# Altium PCB PCB1.PcbDoc
Units mm, origin at the board's own origin, x right, y up, seen from the top; angles counter-clockwise.
Board outline 90 x 63 mm, 2 copper layers (Top Layer, Bottom Layer); 58 components, 71 nets, 341 pads, 142 vias.
Unrouted connection lines stored in the file: 1.
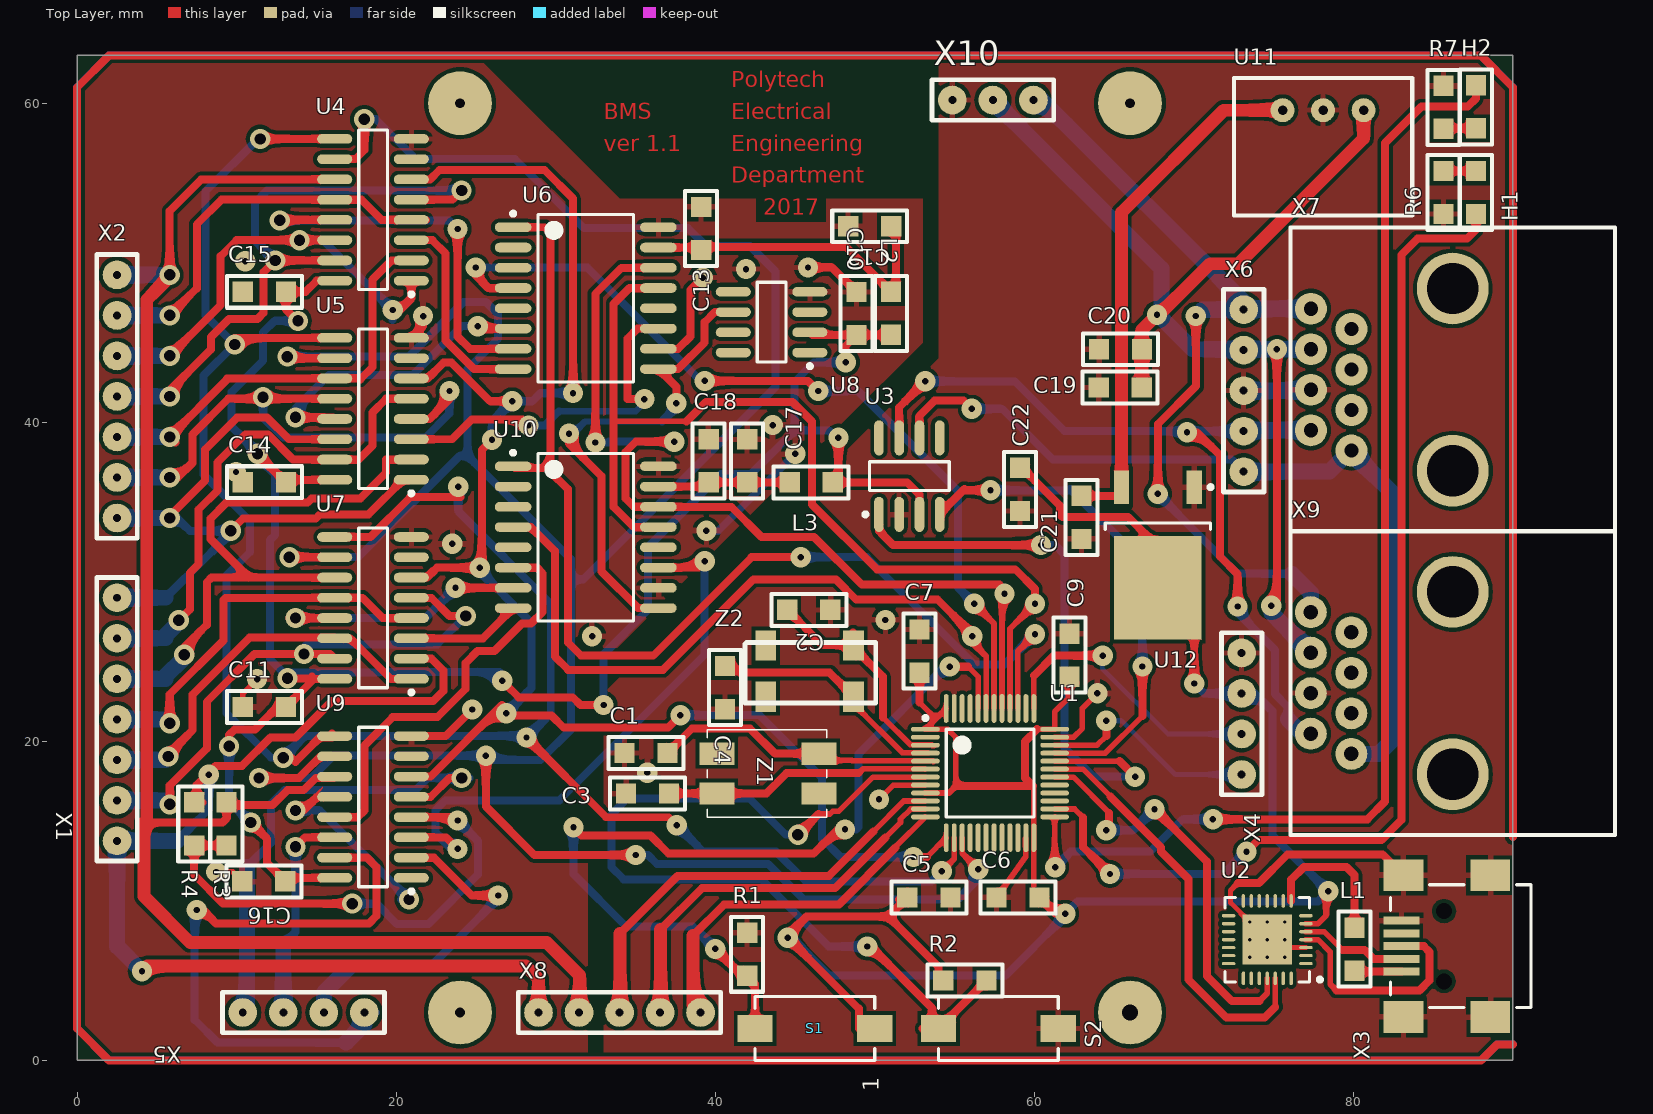
[diagram p0: Top Layer view]
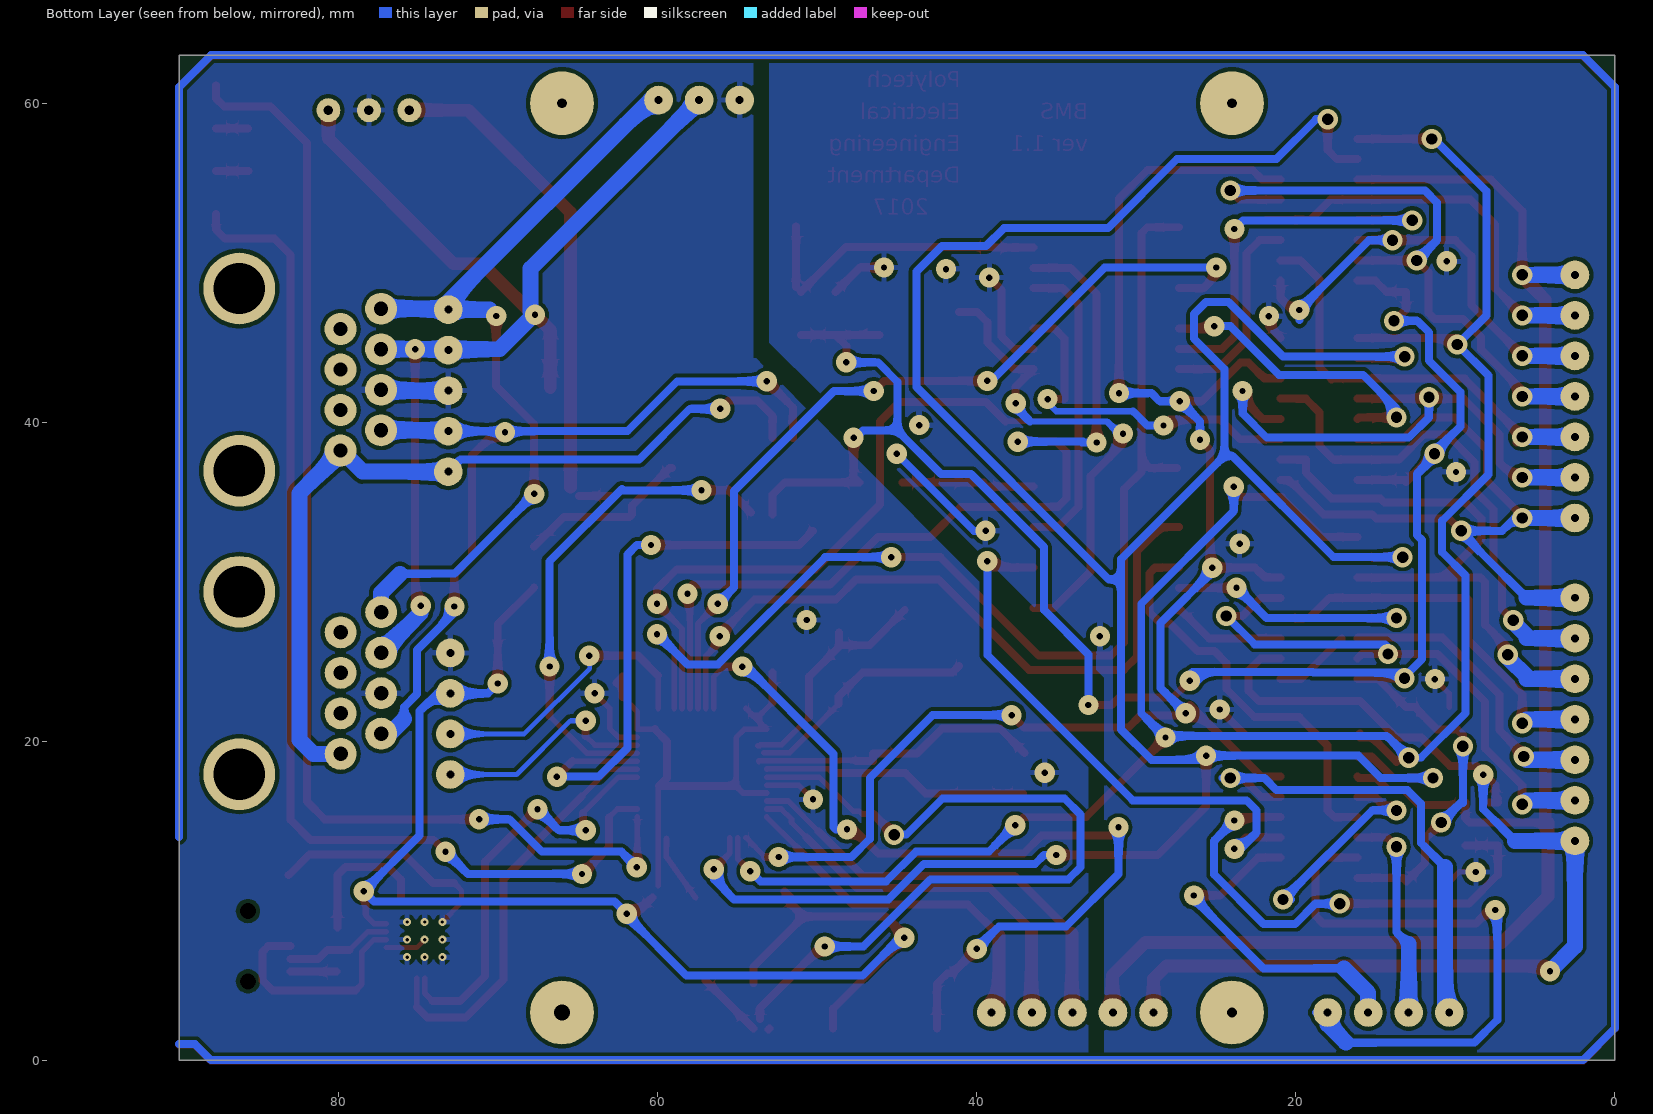
[diagram p1: Bottom Layer view, seen from below]
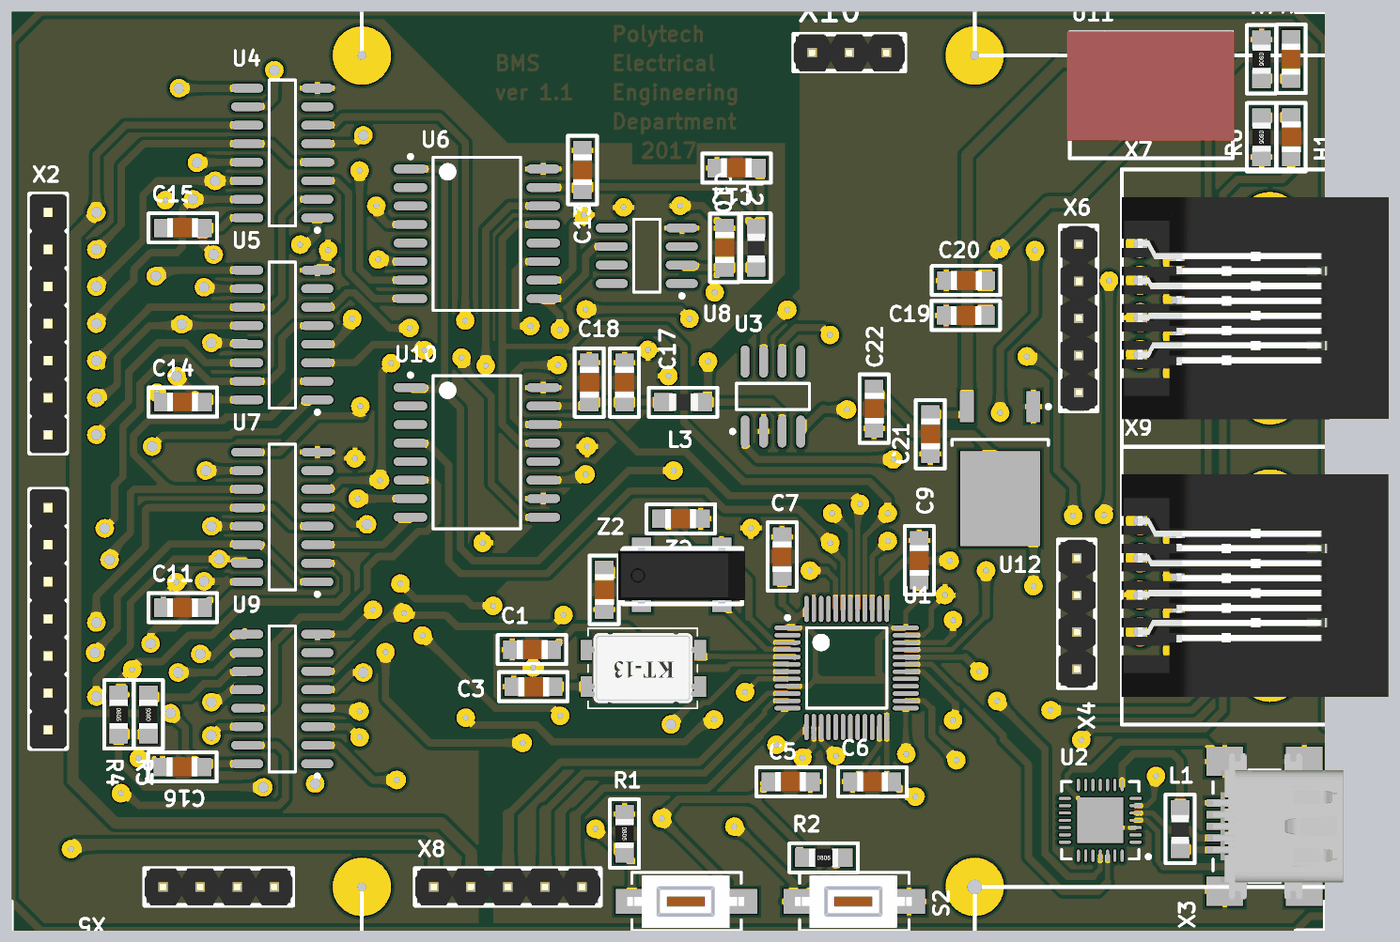
[diagram p2: 3D render of the assembled board from above, using the file's embedded part models]

## Layer stack, top to bottom
Top Solder: solder mask 0.0102, Solder Resist, Dk 3.5
Top Layer: signal copper 0.0356
Dielectric 1: dielectric 0.32, FR-4, Dk 4.8
Bottom Layer: signal copper 0.0356
Bottom Solder: solder mask 0.0102, Solder Resist, Dk 3.5

## Board outline
0,0 0,63 90,63 90,0

## Design rules (kind name [scope] priority, off if disabled: settings)
Clearance Poly_Clearance [All vs InPoly] p1: gap=0.25
Clearance Clearance_1 [All] p2: gap=0.15
PolygonConnect [All] p1: connectstyle=Relief reliefconductorwidth=0.35 reliefentries=4 polygonreliefangle="90 Angle" airgapwidth=0.254
RoutingVias [All] p1: holewidth=0.711 width=1.27 viastyle="Through Hole" minholewidth=0.711 minwidth=1.27 maxholewidth=0.711 maxwidth=1.27
ShortCircuit [InNet('-12V') vs InNet('GNDA')] p1: allowed=TRUE
SolderMaskExpansion [All] p1: expansion=0.102
Width [All] p1: maxlimit=2 minlimit=0.254 preferedwidth=0.35
29 further rules are at their usual default settings.

## Components (designator, comment, footprint, x,y, rotation, side; value= is the part's Value field where it differs from the comment)
C1 "22pF" C0805 34.308,19.27 r0 top
C2 "10pF" C0805 47.214,28.241 r180 top
C3 "22pF" C0805 34.402,16.73 r0 top
C4 "10pF" C0805 40.61,22.018 r90 top
C5 "100nF" C0805 54.74,10.207 r180 top
C6 "100nF" C0805 57.628,10.207 r0 top
C7 "100nF" C0805 52.802,27.004 r270 top
C9 "100nF" C0805 62.2,26.75 r270 top
C10 "100nF" C0805 48.856,45.471 r90 top
C11 "100nF" C0805 13.084,22.145 r180 top
C12 "100nF" C0805 51.034,52.289 r180 top
C13 "1nF" C0805 39.116,50.8 r90 top
C14 "100nF" C0805 13.084,36.242 r180 top
C15 "Condensator" C0805 13.084,48.18 r180 top
C16 "100nF" C0805 13.051,11.223 r180 top
C17 "100nF" C0805 41.998,36.233 r90 top
C18 "1nF" C0805 39.585,36.233 r90 top
C19 "100nF" C0805 64.033,42.185 r0 top
C20 "100nF" C0805 64.059,44.577 r0 top
C21 "100nF" C0805 62.962,32.686 r90 top
C22 "100nF" C0805 59.106,34.442 r90 top
H1 "LED_SMD" C0805 87.686,53.052 r90 top
H2 "LED_SMD" C0805 87.686,61.127 r270 top
L1 "Inductance" L0805 80.078,5.62 r90 top
L2 "Inductance" L0805 51.024,45.48 r90 top
L3 "Inductance" L0805 47.365,36.233 r180 top
R1 "Resistor" R0805 42,8 r270 top
R2 "Resistor" R0805 54.3,5 r0 top
R3 "Resistor" R0805 9.368,13.476 r90 top
R4 "Resistor" R0805 7.336,16.176 r270 top
R6 "Resistor" R0805 85.654,55.752 r270 top
R7 "Resistor" R0805 85.654,61.094 r270 top
S1 "Tact_switch" Tact_switch_smd 50,2 r180 top
S2 "Tact_switch" Tact_switch_smd 61.5,2 r180 top
U1 "STM32F103C8T6" LQFP48_N 57.226,18.009 r0 top
U2 "CP2102-GM" SLAB-QFN-28-3125x3125TP_N 74.605,7.566 r180 top
U3 "MCP2551-I/SN" SOIC-SN8_N 52.167,36.623 r90 top
U4 "M74HC4052M1R" SO16_N 18.546,53.318 r180 top
U5 "M74HC4052M1R" SO16_N 18.546,40.841 r180 top
U6 "AD7705BRZ-REEL7" RW-16_N 31.881,47.781 r0 top
U7 "M74HC4052M1R" SO16_N 18.546,28.363 r180 top
U8 "REF194GSZ" ADI-R-8_N 43.529,46.275 r180 top
U9 "M74HC4052M1R" SO16_N 18.546,15.886 r180 top
U10 "AD7705BRZ-REEL7" RW-16_N 31.881,32.795 r0 top
U11 "DC/DC 5v" "DC/DC R-78E" 80.645,59.563 r180 top
U12 "LD1117ADT12TR" TO-252_N 67.745,31.679 r270 top
X1 "PINS 7x2.54" "PINS 7X2.54" 2.5,29 r270 top
X2 "PINS 7x2.54" "PINS 7X2.54" 2.5,49.24 r270 top
X3 "miniUSB" miniUSB 88.786,7.156 r90 top
X4 "Pins 4x2.54" "Pins 4x2.54" 73,17.92 r90 top
X5 "Pins 4x2.54" "Pins 4x2.54" 18,3 r180 top
X6 "Pins 5x2.54" "Pins 5x2.54" 73.127,36.903 r90 top
X7 "RJ45" RJ45 79.883,38.227 r90 top
X8 "Pins 5x2.54" "Pins 5x2.54" 28.92,3 r0 top
X9 "RJ45" RJ45 79.88,19.21 r90 top
X10 "Pins 3x2.54" "Pins 3x2.54" 54.864,60.198 r0 top
Z1 "12 MHz" "kx 13 12MHz" 46.5,16.73 r180 top
Z2 "32.768kHz" "Geyer KX - 327S 32.768kHz" 48.666,26.001 r180 top

## Footprints (in the part's own frame and the unit in brackets; to place one, negate y for a bottom-side part, rotate by r counter-clockwise, add the part's x,y. Pads: shape width x height; smd on the part's side, far side on the other; paste and mask are expansions set on the pad)
ADI-R-8_N [mm] "SOIC, 8-Leads, Body 4.9x3.9mm, Pitch 1.27mm, IPC Medium Density"
  oval 2.2x0.6 smd: 1(-2.4,1.905) 2(-2.4,0.635) 3(-2.4,-0.635) 4(-2.4,-1.905) 5(2.4,-1.905) 6(2.4,-0.635) 7(2.4,0.635) 8(2.4,1.905)
  silkscreen extent -2.53,-2.5 0.9,2.88, body extent -2,-2.5 2,2.5, height 1.75
C0805 [mm]
  rect 1.27x1.27 smd: 1(0,0) 2(2.7,0)
  silkscreen extent -1,-1 3.7,1, body extent 0.32,-0.66 2.42,0.64, height 0.51
"DC/DC R-78E" [mm]
  round 1.5 hole 0.6: 1(0,0) 2(2.54,0) 3(5.08,0)
  silkscreen extent -3.05,-2.03 8.13,6.6, body extent -3.16,-2.13 8.34,5.42, height 3.18
"Geyer KX - 327S 32.768kHz" [mm]
  rect 1.3x1.9 smd: 1(0,0) 2(0,3.2) 3(5.5,3.2) 4(5.5,0)
  silkscreen extent -1.4,-0.2 6.8,3.6, body extent -1.6,-0.25 7.1,3.55, height 2.51
"kx 13 12MHz" [mm]
  rect 2.2x1.4 smd: 1(0,-2.5) 2(6.4,-2.5) 3(6.4,0) 4(0,0)
  silkscreen extent -0.5,-4 7,1.5, body extent -0.27,-3.77 6.73,1.23
L0805 [mm]
  rect 1.27x1.27 smd: 1(0,0) 2(2.7,0)
  silkscreen extent -1,-1 3.7,1, body extent 0.32,-0.6 2.32,0.6
LQFP48_N [mm] "Thin QFP, 48-Leads, Body 7x7mm, Pitch 0.5mm, IPC Medium Density"
  oval 1.8x0.3 smd: 1(-4.05,2.75) 2(-4.05,2.25) 3(-4.05,1.75) 4(-4.05,1.25) 5(-4.05,0.75) 6(-4.05,0.25) 7(-4.05,-0.25) 8(-4.05,-0.75) 9(-4.05,-1.25) 10(-4.05,-1.75) 11(-4.05,-2.25) 12(-4.05,-2.75) 25(4.05,-2.75) 26(4.05,-2.25) 27(4.05,-1.75) 28(4.05,-1.25) 29(4.05,-0.75) 30(4.05,-0.25) 31(4.05,0.25) 32(4.05,0.75) 33(4.05,1.25) 34(4.05,1.75) 35(4.05,2.25) 36(4.05,2.75)
  oval 0.3x1.8 smd: 13(-2.75,-4.05) 14(-2.25,-4.05) 15(-1.75,-4.05) 16(-1.25,-4.05) 17(-0.75,-4.05) 18(-0.25,-4.05) 19(0.25,-4.05) 20(0.75,-4.05) 21(1.25,-4.05) 22(1.75,-4.05) 23(2.25,-4.05) 24(2.75,-4.05) 37(2.75,4.05) 38(2.25,4.05) 39(1.75,4.05) 40(1.25,4.05) 41(0.75,4.05) 42(0.25,4.05) 43(-0.25,4.05) 44(-0.75,4.05) 45(-1.25,4.05) 46(-1.75,4.05) 47(-2.25,4.05) 48(-2.75,4.05)
  silkscreen extent -4.17,-2.75 2.75,3.57, body extent -3.5,-3.5 3.5,3.5, height 1.6
miniUSB [mm]
  rect 0.5x2.25 smd: 1(-1.6,5.775) 2(-0.8,5.775) 3(0,5.775) 4(0.8,5.775) 5(1.6,5.775)
  rect 2x2.5 smd: 6(-4.45,5.65) 7(4.45,5.65) 8(-4.45,0.2) 9(4.45,0.2)
  rect 0x0 hole 1 unplated: ""(-2.2,3.1) ""(2.2,3.1)
  silkscreen extent -3.85,-2.35 3.85,6.45, body extent -5,-2.45 5,6.45, height 3.95
"Pins 3x2.54" [mm]
  round 1.8 hole 0.5: 1(0,0) 2(2.54,0) 3(5.08,0)
  silkscreen extent -1.27,-1.27 6.35,1.27, body extent -1.27,-1.27 6.35,1.27, height 8.81
"Pins 4x2.54" [mm]
  round 1.8 hole 0.5: 1(0,0) 2(2.54,0) 3(5.08,0) 4(7.62,0)
  silkscreen extent -1.27,-1.27 8.89,1.27, body extent -1.27,-1.27 8.89,1.27, height 8.81
"Pins 5x2.54" [mm]
  round 1.8 hole 0.5: 1(0,0) 2(2.54,0) 3(5.08,0) 4(7.62,0) 5(10.16,0)
  silkscreen extent -1.27,-1.27 11.43,1.27, body extent -1.27,-1.27 11.43,1.27, height 8.81
"PINS 7X2.54" [mm]
  round 1.8 hole 0.5: 1(0,0) 2(2.54,0) 3(5.08,0) 4(7.62,0) 5(10.16,0) 6(12.7,0) 7(15.24,0)
  silkscreen extent -1.27,-1.27 16.51,1.27, body extent -1.27,-1.27 16.51,1.27, height 8.54
R0805 [mm]
  rect 1.27x1.27 smd: 1(0,0) 2(2.7,0)
  silkscreen extent -1,-1 3.7,1, body extent 0.35,-0.62 2.35,0.63, height 0.61
RJ45 [mm]
  round 2 hole 0.9: 1(0,0) 2(1.27,2.54) 3(2.54,0) 4(3.81,2.54) 5(5.08,0) 6(6.35,2.54) 7(7.62,0) 8(8.89,2.54)
  round 4.5 hole 3.21: 9(-1.27,-6.35) 10(10.16,-6.35)
  silkscreen extent -5.08,-16.51 13.97,3.81, body extent -3.18,-14.48 12.07,3.81, height 12.7
RW-16_N [mm] "SOIC, 16-Leads, Body 10.3x7.5mm, Pitch 1.27mm, IPC Medium Density"
  oval 2.3x0.6 smd: 1(-4.55,4.445) 2(-4.55,3.175) 3(-4.55,1.905) 4(-4.55,0.635) 5(-4.55,-0.635) 6(-4.55,-1.905) 7(-4.55,-3.175) 8(-4.55,-4.445) 9(4.55,-4.445) 10(4.55,-3.175) 11(4.55,-1.905) 12(4.55,-0.635) 13(4.55,0.635) 14(4.55,1.905) 15(4.55,3.175) 16(4.55,4.445)
  silkscreen extent -4.67,-5.25 3,5.42, body extent -3.8,-5.25 3.8,5.25, height 2.65
SLAB-QFN-28-3125x3125TP_N [mm] "QFN, 28-Leads, Body 5x5mm, Pitch 0.5mm, Thermal Pad 3.13x3.13mm, IPC Medium Density"
  oval 0.85x0.2 smd: 1(-2.425,1.5) 2(-2.425,1) 3(-2.425,0.5) 4(-2.425,0) 5(-2.425,-0.5) 6(-2.425,-1) 7(-2.425,-1.5) 15(2.425,-1.5) 16(2.425,-1) 17(2.425,-0.5) 18(2.425,0) 19(2.425,0.5) 20(2.425,1) 21(2.425,1.5)
  oval 0.2x0.85 smd: 8(-1.5,-2.425) 9(-1,-2.425) 10(-0.5,-2.425) 11(0,-2.425) 12(0.5,-2.425) 13(1,-2.425) 14(1.5,-2.425) 22(1.5,2.425) 23(1,2.425) 24(0.5,2.425) 25(0,2.425) 26(-0.5,2.425) 27(-1,2.425) 28(-1.5,2.425)
  rect 3.13x3.13 smd: 29(0,0)
  silkscreen extent -3.42,-2.65 2.65,2.65, body extent -2.5,-2.5 2.5,2.5, height 1
SO16_N [mm] "SOIC, 16-Leads, Body 9.9x3.9mm, Pitch 1.27mm, IPC Medium Density"
  oval 2.2x0.6 smd: 1(-2.4,4.445) 2(-2.4,3.175) 3(-2.4,1.905) 4(-2.4,0.635) 5(-2.4,-0.635) 6(-2.4,-1.905) 7(-2.4,-3.175) 8(-2.4,-4.445) 9(2.4,-4.445) 10(2.4,-3.175) 11(2.4,-1.905) 12(2.4,-0.635) 13(2.4,0.635) 14(2.4,1.905) 15(2.4,3.175) 16(2.4,4.445)
  silkscreen extent -2.53,-5 0.9,5.42, body extent -1.95,-4.95 1.95,4.95, height 1.75
SOIC-SN8_N [mm] "SOIC, 8-Leads, Body 4.9x3.8mm, Pitch 1.27mm, IPC Medium Density"
  oval 2.2x0.6 smd: 1(-2.4,1.905) 2(-2.4,0.635) 3(-2.4,-0.635) 4(-2.4,-1.905) 5(2.4,-1.905) 6(2.4,-0.635) 7(2.4,0.635) 8(2.4,1.905)
  silkscreen extent -2.52,-2.5 0.9,2.88, body extent -2,-2.5 2,2.5, height 1.75
Tact_switch_smd [mm]
  rect 2.2x1.7 smd: 1(0,0) 2(7.5,0)
  silkscreen extent 0,-2 7.5,2, body extent -0.19,-1.8 7.81,1.8, height 2.51
TO-252_N [mm] "D-PAK, 4-Leads, Body 6.1x6.5mm, Pitch 2.28mm, Lead Span 9.7mm, IPC Medium Density"
  rect 2.1x0.95 smd: 1(-4.25,2.28) 3(-4.25,-2.28)
  rect 6.5x5.5 smd: 4(2.05,0)
  silkscreen extent -4.37,-3.3 -1.6,3.43, body extent -2,-3.3 4.2,3.3, height 2.4

## Part data
C1 C2 C3 C4 C5 C6 C7 C9 C10 C11 C12 C13 C14 C16 C17 C18 C19 C20 C21 C22: library part Condensator
U1: "STM32 ARM-based 32-bit MCU with 64 Kbytes Flash, 48-pin LQFP, Industrial Temperature"
U2: "Single-Chip USB to UART Bridge, 1024 Bytes EEPROM, -40 to 85 degC, 28-pin QFN, Tube"
U3: "High-Speed CAN Transceiver, 8-Pin SOIC, Industrial Temperature"
U4 U5 U7 U9: "Analog Multiplexer/Demultiplexer Dual 4-Channel"
U6 U10: "Dual 16-Bit Sigma-Delta Analog-to-Digital Converter with Serial, SPI Interface, 1 mW, 3 V / 5 V, 500SPS, -40 to +85 degC, RW-16, Pb-Free, Reel"
U8: "Precision Micropower, Low Dropout Voltage Reference, 4.5 V Output, 4.6 to 15 V Supply, Industrial, 8-pin SOIC (R-8), Tube"
U11: library part "DC/DC R-78E"
U12: "1A, Low Drop Positive Voltage Regulator, 1.2V, 3-Pin DPAK, Tape and Reel"
Z1: library part "KX 13 Geyer"
Z2: library part "Crystal Oscillator"

## Free pads (board coordinates)
  round 4 hole 0.6: 1(24,3) 2(24,60) 3(66,60)
  round 4 hole 1: 4(66,3)

## Via types
v1: diameter 1.27, hole 0.4, Top Layer to Bottom Layer, 93 vias
v2: diameter 1.27, hole 0.711, Top Layer to Bottom Layer, 40 vias
v3: diameter 0.5, hole 0.2, Top Layer to Bottom Layer, 9 vias

## Nets (pads, with @x,y where several pads share a name; then routed paths per layer and width w, separated by ;. In a path a pad name is that pad's centre, name@x,y a point inside that pad or via, vN(x,y) a via of type N, cw(c..) or ccw(c..) an arc to the next point about the centre after c; other vN are vias at no path point)
+3.3V: C5.2 C6.2 C7.2 C9.2 C22.2 R2.1 S1.1 U1.1 U1.9 U1.24 U1.36 U1.48 U2.6 U12.4 X4.3 | length 132.8
  Top Layer w0.35: 52.802,22.433 53.826,21.409 ; U1.9 54.655,16.759 55.088,17.192 55.088,20.24 54.569,20.759 U1.1 53.826,21.409 ; U1.48 53.826,21.409 ; 59.976,10.941 U1.24 59.976,17.258 ; 60.179,20.759 U1.36 61.276,21.856 62.2,22.78 ; U2.6 77.784,8.566 78.3,9.082 78.3,10.479 v1(78.427,10.606)
  Top Layer w0.5: v1@44.5,7.797 45.72,9.017 50.85,9.017 ; v1(44.547,7.692) 49,3.239 S1.1@49,2 ; C5.2@51.532,10.08 C5.2@52.04,10.588 ; C5.2 50.85,9.017 ; 52.802,22.433 C7.2 ; R2.1@54,4.834 54,5.867 50.85,9.017 ; 55.088,17.192 59.91,17.192 59.411,17.692 59.411,19.991 60.179,20.759 ; C22.2 59.251,37.142 61.62,34.773 61.62,34.214 61.773,34.061 65.888,34.061 U12.4@67.745,32.204 ; C6.2 v1@61.344,9.191 ; 62.2,22.78 C9.2 C9.2@62.581,23.669 ; U12.4 70.028,27.346 v1(70.028,23.622)
  Bottom Layer w0.5: v1@44.776,7.692 47.159,5.309 58.191,5.309 v1@61.883,9.001 ; v1(61.946,9.191) 62.712,9.957 77.778,9.957 v1(78.427,10.606) 74.93,14.103 74.93,21.895 73.825,23 X4.3 70.65,23 v1(70.028,23.622)
+5V: C10.1 C11.1 C14.1 C15.1 C16.1 L2.1 L3.1 U3.3 U4.16 U5.16 U7.16 U8.2 U9.16 | length 132.2
  Top Layer w0.5: v2(9.525,19.685) 9.525,20.397 9.876,20.748 11.146,20.748 12.543,22.145 C11.1 14.857,23.918 U7.16 ; v2(10.892,14.906) 11.908,13.89 11.908,12.366 C16.1 13.269,11.441 U9.16 ; v2@11.146,38.274 11.146,38.18 v2(11.306,38.02) C14.1 ; C14.1@13.078,36.396 U5.16 ; v2(13.183,23.952) 14.628,23.952 14.726,24.05 ; v2(13.843,46.355) 13.799,46.355 13.084,47.07 C15.1 14.321,48.18 15.014,48.873 U4.16 ; v1@26.919,23.517 27.678,22.758 31.064,22.758 31.549,22.274 v1(33,22.274) ; U8.2@46.098,45.471 47.84,45.471 C10.1 ; v1(47.722,39.036) 47.722,36.59 L3.1 52.031,36.233 52.802,35.462 U3.3 ; v1(48.179,43.76) 48.179,44.794 C10.1 ; L2.1 48.959,45.48 48.95,45.471 C10.1
  Bottom Layer w0.5: v2(9.525,19.685) 9.525,16.129 9.597,16.201 v2(10.892,14.906) ; v2(11.306,38.02) 11.306,37.86 12.416,36.75 12.416,32.94 12.09,32.614 12.09,25.146 13.182,24.054 13.432,24.304 18.893,24.304 18.949,24.36 26.467,24.36 26.64,24.187 v1(26.64,23.796) ; v2@11.306,38.114 9.677,39.743 9.677,41.885 11.654,43.862 11.654,45.64 12.369,46.355 v2(13.843,46.355) ; v2(13.183,23.952) v2@13.183,24.046 ; v1(33,22.274) 33,25.437 32.99,25.447 35.784,28.241 35.784,32.178 40.356,36.75 42.236,36.75 44.979,39.493 ; v1(47.722,39.036) 47.595,39.036 47.138,39.493 44.979,39.493 ; v1(48.179,43.76) 46.198,43.76 44.979,42.541 44.979,39.493 ; v2@13.183,24.046 13.183,24.054 13.186,24.05 v2@13.183,24.046
+12V: C19.2 C20.2 U11.1 X6.4 X7.6 X9.6 X10.2 | length 72.9
  Top Layer w0.5: v1(67.691,46.736) v1@67.818,46.736 ; v1(74.854,28.499) 75.209,28.854 v1(75.209,44.577)
  Top Layer w0.8: C19.2 66.733,45.778 v1(67.691,46.736) ; v1@67.818,46.736 71.025,49.943 72.803,49.943 80.645,57.785 U11.1
  Bottom Layer w0.5: v1(67.691,46.736) 67.767,46.736 v1@67.961,46.93 ; v1@74.854,28.046 v1(74.854,28.499)
  Bottom Layer w1: X10.2 67.961,49.641 v1@67.961,46.93 ; v1@67.767,46.736 69.926,44.577 v1(75.209,44.577) X7.6 ; v1@74.854,28.046 X9.6
+24V: X6.5 X7.8 X9.8 X10.3 | length 51.7
  Top Layer w0.5: v1(67.742,35.509) 67.742,39.878 70.129,42.266 v1(70.129,46.66) ; X7.8@77.26,47.099 X7.8@77.463,47.099
  Bottom Layer w0.5: X10.3 X10.3@60.477,60.198 ; v1(67.742,35.509) 72.746,30.505 76.149,30.505 ; v1(70.129,46.66) v1@70.533,47.063
  Bottom Layer w1: X10.3@60.477,60.198 73.558,47.117 X7.8 ; v1@70.533,47.063 X6.5 ; 76.149,30.505 77.34,29.314 X9.8
+_CELL_1: U7.5 U7.15 X1.6 | length 35.3
  Top Layer w0.5: v2(5.802,16.046) 5.802,17.232 8.128,19.558 8.128,22.479 11.125,25.476 v2(14.224,25.476) 15.858,25.476 U7.15 ; U7.5 22.2,28.998 23.338,27.86 v2(24.354,27.86)
  Bottom Layer w0.5: v2@5.548,16.3 v2(5.802,16.046) ; v2@14.008,25.692 14.398,26.082 22.576,26.082 v2(24.354,27.86)
  Bottom Layer w1: X1.6 v2@5.548,16.3
+_CELL_2: U7.1 U7.14 X1.5 | length 23.1
  Top Layer w0.5: v2(5.715,19.05) 5.715,19.177 7.239,20.701 7.239,22.937 10.813,26.511 16.093,26.511 U7.14 ; U7.14@17.12,26.458 19.66,23.918 U7.1
  Bottom Layer w0.5: v2@5.548,18.84 5.715,19.007 v2(5.715,19.05)
  Bottom Layer w1: X1.5 v2@5.548,18.84
+_CELL_3: U7.4 U7.12 X1.4 | length 24.9
  Top Layer w0.5: v2(5.802,21.126) 5.802,22.947 9.169,26.314 9.169,28.854 9.313,28.998 U7.12 17.882,28.998 19.152,27.728 U7.4
  Bottom Layer w0.5: v2@5.548,21.38 v2(5.802,21.126)
  Bottom Layer w1: X1.4 v2@5.548,21.38
+_CELL_4: U5.2 U7.11 X1.3 | length 37.7
  Top Layer w0.5: v2(6.706,25.425) 6.706,25.883 8.128,27.305 8.128,29.972 8.424,30.268 10.77,30.268 ; U7.11 10.77,30.268 ; U5.2 19.374,37.666 19.374,36.85 17.75,35.226 14.702,35.226 14.448,34.972 9.368,34.972 8.352,33.956 8.352,32.686 10.77,30.268
  Bottom Layer w0.5: 5.461,24.007 5.548,23.92 ; v2@6.706,25.252 v2(6.706,25.425)
  Bottom Layer w1: X1.3 5.548,23.92 ; 5.461,24.007 v2@6.706,25.252
+_CELL_5: U5.5 U5.15 X1.2 | length 31.8
  Top Layer w0.5: v2(6.375,27.584) 7.061,28.27 7.061,30.556 7.62,31.115 7.62,34.544 8.788,35.712 8.788,37.49 10.541,39.243 11.955,39.243 13.532,37.666 U5.15 17.65,37.666 18.512,38.528 18.512,40.613 19.374,41.476 U5.5
  Bottom Layer w0.5: 5.465,26.543 5.548,26.46 ; v2@6.375,27.453 v2(6.375,27.584)
  Bottom Layer w1: X1.2 5.548,26.46 ; 5.465,26.543 v2@6.375,27.453
+_CELL_6: U5.1 U5.14 X1.1 X2.7 | length 43.8
  Top Layer w0.5: v2(5.802,34) 5.802,34.123 8.026,36.347 8.026,38.299 10.033,40.306 11.908,40.306 13.278,38.936 U5.14 ; v2(9.622,33.194) 10.384,33.956 14.956,33.956 15.21,34.21 18.252,34.21 20.438,36.396 U5.1
  Bottom Layer w0.5: 5.548,29 9.622,33.074 v2(9.622,33.194) 7.082,33.194 6.276,34 v2(5.802,34)
  Bottom Layer w1: X1.1 5.548,29 ; X2.7 v2(5.802,34)
+_CELL_7: U5.4 U5.12 X2.6 | length 35.7
  Top Layer w0.5: v2(5.802,36.54) 6.31,36.54 7.226,37.456 7.226,39.23 9.472,41.476 U5.12 ; U5.4 22.095,40.206 23.338,41.449 v1(23.338,41.957)
  Bottom Layer w0.5: v2(11.654,41.576) 11.654,40.306 12.924,39.036 21.814,39.036 23.338,40.56 v1(23.338,41.957)
  Bottom Layer w1: X2.6 v2(5.802,36.54)
+_CELL_8: U4.2 U5.11 X2.5 | length 26.9
  Top Layer w0.5: v2@6.156,38.726 v2(5.802,39.08) 9.398,42.676 9.398,42.746 U5.11 17.75,42.746 17.75,42.692 18.512,43.454 18.512,48.942 19.713,50.143 U4.2
  Bottom Layer w1: X2.5 v2(5.802,39.08)
+_CELL_9: U4.5 U4.15 X2.4 | length 40.1
  Top Layer w0.5: v2(5.802,41.62) 5.802,41.997 8.382,44.577 8.382,45.339 9.525,46.482 11.303,46.482 11.684,46.863 11.684,49.411 v2(12.416,50.143) U4.15 ; U4.5 23.523,53.953 v2(24.1,54.53)
  Bottom Layer w0.5: v2(12.416,50.143) 11.146,51.413 11.146,53.768 11.908,54.53 v2(24.1,54.53)
  Bottom Layer w1: X2.4 v2(5.802,41.62)
+_CELL_10: U4.1 U4.14 X2.3 | length 29.3
  Top Layer w0.5: v2(5.802,44.16) 9,47.358 9,50.413 10,51.413 v2(13.94,51.413) U4.14 ; v1(19.782,47.037) 20.205,47.037 20.946,47.778 U4.1
  Bottom Layer w0.5: v2(13.94,51.413) 15.406,51.413 v1(19.782,47.037) 19.782,46.402
  Bottom Layer w1: X2.3 v2(5.802,44.16)
+_CELL_11: U4.4 U4.12 X2.2 | length 25.3
  Top Layer w0.5: v2(5.802,46.7) 7.5,48.398 7.5,52.408 9.045,53.953 U4.12 17.819,53.953 19.089,52.683 U4.4 U4.4@21.872,52.683
  Bottom Layer w1: X2.2 v2(5.802,46.7)
+_CELL_12: R3.2 U4.11 U9.11 X2.1 X8.2 | length 103.6
  Top Layer w0.5: 4.369,15.084 4.191,14.906 9.114,14.906 9.368,15.16 R3.2 9.542,16.002 12.242,16.002 13.178,16.938 14.194,16.938 14.956,17.7 16.055,17.7 U9.11 ; v2@5.802,49.121 v2(5.802,49.24) 5.802,53.25 7.775,55.223 U4.11
  Top Layer w0.8: 4.191,14.906 4.191,10.287 7.082,7.396 29.434,7.396 31.496,5.334 X8.2@31.496,3.036 ; 4.369,15.084 4.369,47.688 v2@5.802,49.121
  Bottom Layer w1: X2.1 v2(5.802,49.24)
-_CELL_1: R4.1 U7.2 X1.7 X8.1 | length 67.9
  Top Layer w0.5: v1(4.064,5.588) v1@4.394,5.918 ; R4.1 R4.1@7.844,16.176 ; R4.1@7.336,16.43 7.493,16.587 7.493,17.272 8.67,18.449 10.321,18.449 12.112,20.24 13.686,20.24 15.972,22.526 22.322,22.526 22.962,23.166 22.962,24.426 22.2,25.188 U7.2
  Top Layer w0.8: v1@4.394,5.918 28.118,5.918 28.92,5.116 X8.1
  Bottom Layer w0.5: X1.7 X1.7@2.51,13.76 ; 6.267,13.76 8.255,15.748 v1(8.255,17.907)
  Bottom Layer w1: v1(4.064,5.588) 2.51,7.142 2.51,13.76 6.267,13.76
ADC1_CH1+: U4.13 U6.7 | length 25.4
  Top Layer w0.5: v2@12.67,52.625 v2(12.699,52.654) 12.728,52.683 U4.13 ; v1(23.846,52.117) 23.846,45.386 24.626,44.606 U6.7
  Bottom Layer w0.5: v2(12.699,52.654) 23.309,52.654 v1(23.846,52.117)
ADC1_CH1-: U4.3 U6.8 | length 12.9
  Top Layer w0.5: U4.3 22.264,51.413 23.084,50.593 23.084,45.132 24.88,43.336 U6.8
ADC1_CH2+: U5.13 U6.6 | length 18.9
  Top Layer w0.5: v2(13.686,40.306) 16.046,40.306 U5.13 ; v1(25.116,46.021) 25.261,45.876 U6.6
  Bottom Layer w0.5: v2(13.686,40.306) 13.686,40.867 15.792,42.973 21.052,42.973 24.1,46.021 v1(25.116,46.021)
ADC1_CH2-: U5.3 U6.11 | length 23.1
  Top Layer w0.5: U5.3 23.492,38.936 24.735,40.179 27.91,40.179 v1(28.291,39.798) ; v1(35.56,41.453) 34.514,41.453 34.514,45.259 35.131,45.876 U6.11
  Bottom Layer w0.4: 30.196,40.687 35.022,40.687 v1@35.56,41.225
  Bottom Layer w0.5: v1(28.291,39.798) 29.307,39.798 30.196,40.687 ; v1@35.56,41.225 v1(35.56,41.453)
ADC2_CH1+: U7.13 U10.7 | length 17.6
  Top Layer w0.5: v2@13.31,27.728 v2(13.686,27.728) U7.13 ; v1@23.465,29.511 23.574,29.62 v1(23.719,29.62) U10.7
  Bottom Layer w0.5: v2(13.686,27.728) 21.827,27.728 ; 21.832,27.733 v1(23.719,29.62)
ADC2_CH1-: U7.3 U10.8 | length 7.2
  Top Layer w0.5: U7.3 25.439,26.458 U10.8
ADC2_CH2+: U9.13 U10.6 | length 26.1
  Top Layer w0.5: U9.13 17.587,15.251 18.004,15.668 18.004,19.732 19.782,21.51 22.576,21.51 24.358,23.292 24.358,24.917 25.096,25.654 26.162,25.654 27.89,27.382 28.448,27.382 29.18,28.114 29.18,30.527 28.817,30.89 U10.6
ADC2_CH2-: U9.3 U10.11 | length 36.3
  Top Layer w0.5: U9.3 23.12,13.981 v1(23.846,13.255) ; U10.11 38.941,30.89 v1(39.34,31.289)
  Bottom Layer w0.5: v1(23.846,13.255) 23.465,13.255 22.449,14.271 22.449,15.668 23.084,16.303 30.222,16.303 39.34,25.421 v1(39.34,31.289)
ANALOG1_+: U9.12 | length 12.7
  Top Layer w0.5: v2(13.686,15.668) 14.194,15.668 15.047,16.521 U9.12
  Bottom Layer w0.5: v2(13.686,15.668) 15.21,15.668 20.544,10.334 20.29,10.08 v2(20.798,10.08)
ANALOG1_-: U9.1
ANALOG2_+: U9.14 X5.3 | length 13.4
  Top Layer w0.5: v2(13.686,13.382) 14.285,13.981 U9.14
  Bottom Layer w0.5: 12.92,7.282 13.686,8.048 v2(13.686,13.382)
  Bottom Layer w1: X5.3 12.92,7.282
ANALOG2_-: U9.5 X5.4 | length 30.2
  Top Layer w0.5: U9.5 22.159,16.521 23.338,17.7 v2(24.1,17.7)
  Bottom Layer w0.5: 10.638,12.112 12.162,13.636 12.162,16.099 13.001,16.938 21.205,16.938 21.967,17.7 v2(24.1,17.7) v2@24.608,17.7
  Bottom Layer w1: X5.4@10.638,3.258 10.638,12.112
ANALOG3_+: U9.15 X5.1 | length 37.9
  Top Layer w0.5: v1(7.493,9.423) 7.874,9.423 8.712,8.585 18.287,8.585 18.766,9.064 18.766,12.112 18.167,12.711 U9.15
  Bottom Layer w0.5: v1(7.493,9.423) 7.366,9.296 7.366,2.54 8.788,1.118 16.866,1.118 ; X5.1@18,2.252 X5.1 X5.1@18.748,3
  Bottom Layer w1: 16.866,1.118 X5.1@18,2.252
ANALOG3_-: U9.2 X5.2 | length 21.2
  Top Layer w0.5: U9.2 22.358,12.711 24.735,10.334 v1(26.386,10.334)
  Bottom Layer w0.5: 16.988,5.762 22.018,5.762 26.386,10.13 v1(26.386,10.334)
  Bottom Layer w1: X5.2 15.46,4.234 16.988,5.762
BATT_KEY1: U1.10 X8.3 | length 27.5
  Top Layer w0.35: 49.911,14.351 51.819,16.259 U1.10
  Top Layer w0.5: 34.036,7.954 37.639,11.557 47.117,11.557 49.911,14.351
  Top Layer w0.8: X8.3@34.036,3.036 34.036,7.954
BATT_KEY2: U1.11 X8.4 | length 25
  Top Layer w0.35: 50.673,13.97 51.614,14.911 51.614,15.119 52.229,15.734 52.234,15.734 52.259,15.759 U1.11
  Top Layer w0.5: 36.576,8.208 39.163,10.795 47.498,10.795 50.673,13.97
  Top Layer w0.8: X8.4@36.576,3.036 36.576,8.208
BATT_KEY3: U1.12 X8.5 | length 22
  Top Layer w0.35: 51.308,13.335 51.308,13.391 U1.12
  Top Layer w0.5: 38.608,7.827 40.56,9.779 47.752,9.779 51.308,13.335
  Top Layer w0.8: X8.5@38.608,3.472 38.608,7.827
BOOT: R1.2 S1.2 U1.44 | length 55.8
  Top Layer w0.35: 55.85,24.685 56.476,24.059 U1.44
  Top Layer w0.5: v1(31.115,14.605) 31.623,14.097 35.941,14.097 37.084,12.954 46.154,12.954 47.678,14.478 v1(48.133,14.478) ; v1(40.005,6.985) 41.529,5.461 41.839,5.461 R1.2 42.5,4.8 S1.2 ; v1(54.707,24.685) 55.85,24.685
  Bottom Layer w0.5: v1(31.115,14.605) 31.115,11.684 34.417,8.382 38.608,8.382 v1(40.005,6.985) ; v1(48.133,14.478) 48.818,14.478 48.975,14.635 48.975,19.207 54.453,24.685 v1(54.707,24.685)
CAN_RX: U1.32 U3.1 | length 35
  Top Layer w0.35: U1.32 65.34,18.759
  Top Layer w0.5: U3.1@50.262,33.194 51.151,32.305 v1(60.422,32.305) ; 65.34,18.759 v1(66.319,17.78)
  Bottom Layer w0.5: v1(60.422,32.305) 61.311,32.305 61.9,31.716 61.9,19.583 63.703,17.78 v1(66.319,17.78)
CAN_TX: U1.33 U3.4 | length 31.3
  Top Layer w0.35: U1.33 64.446,19.259 66.777,21.59
  Top Layer w0.5: U3.4@54.148,34.337 55.625,35.814 55.701,35.738 v1(57.252,35.738) ; 66.777,21.59 v1(66.777,24.689)
  Bottom Layer w0.5: v1(57.252,35.738) 62.171,35.738 62.247,35.814 66.777,31.284 v1(66.777,24.689)
CANH: U3.7 X6.2 X7.2 X9.2 | length 53
  Top Layer w0.5: U3.7 51.532,40.94 v1(53.162,42.57) ; v1(69.571,39.37) 70.206,39.37 71.628,37.948 71.628,31.598 72.746,30.48 v1(72.746,28.448) ; X6.2@72.698,39.443 X6.2 ; X7.2@77.289,39.443 X7.2
  Bottom Layer w0.5: v1(53.162,42.57) 58.776,42.57 61.903,39.443 X6.2 X6.2@73.181,39.497 ; v1(72.746,28.448) 72.746,28.067 75.082,25.73 75.082,22.962 75.895,22.149 75.895,21.387 ; X9.2@76.802,20.48 X9.2
  Bottom Layer w1: X6.2@73.181,39.497 X7.2 ; 75.895,21.387 X9.2@76.802,20.48
CANL: U3.6 X6.1 X7.1 X9.1 | length 53.3
  Top Layer w0.5: U3.6 52.802,40.407 53.746,41.351 55.575,41.351 v1(56.083,40.843)
  Bottom Layer w0.5: v1(56.083,40.843) 57.988,40.843 61.163,37.668 72.362,37.668 X6.1
  Bottom Layer w1: X6.1 78.494,36.903 79.8,38.209 82.467,35.542 82.467,20.095 81.582,19.21 X9.1
GND: C1.1 C2.1 C3.1 C4.1 C5.1 C6.1 C7.1 C9.1 C19.1 C20.1 C21.1 C22.1 R1.1 R6.2 R7.1 S2.1 U1.8 U1.23 U1.35 U1.47 U2.3 U2.29 U3.2 U11.2 U12.1 X3.5 X3.6 X3.7 X3.8 X3.9 X4.4 X6.3 X7.4 X9.4 X10.1 | length 33.8
  Top Layer w0.3: 72.759,11.11 72.302,10.653 72.302,9.869 v3(73.505,8.666) ; v3(74.605,7.566) 75.105,7.066 U2.3
  Top Layer w0.35: v1(50.267,16.358) 51.168,17.259 U1.8 ; C6.1 59.476,12.802 U1.23@59.451,13.908 ; U1.35 62.474,20.259 63.017,20.803 63.017,22.073 v1(63.957,23.012)
  Top Layer w0.5: 72.759,11.11 74.08,11.11 75.887,12.917 81.825,12.917 X3.7
  Bottom Layer w0.3: X7.4@77.289,41.983 X7.4
  Bottom Layer w1: X6.3 X7.4@77.289,41.983
  other v1: 35.738,18.034 50.668,27.606
  other v3: 73.505,6.466 74.605,6.466 75.705,6.466 73.505,7.566 75.705,7.566 74.605,8.666 75.705,8.666
GNDA: C10.2 C11.2 C12.2 C13.2 C14.2 C15.2 C16.2 C17.2 C18.2 U4.8 U5.8 U6.10 U6.16 U7.8 U8.4 U9.8 U10.10 U10.16 | length 27.8
  Top Layer w0.35: v1(8.712,11.811) 9.763,11.811 C16.2 ; C11.2 10.384,23.008 v1(11.278,23.901)
  Top Layer w0.5: U9.8 23.1,20.331 v1(24.765,21.996) ; U5.8 21.687,46.027 v1(21.687,46.656) ; U6.10 37.671,44.606 38.451,45.386 38.451,48.307 v1(39.213,49.069) ; v1(45.817,49.704) 47.323,49.704 C10.2
  Bottom Layer w0.5: v1(39.446,33.198) 40.183,33.198 v1(45.009,38.024)
  other v1: 32.279,26.59 23.52,32.385 9.957,36.881 43.607,39.823 41.931,49.602 10.541,50.089
MULTIP_A: U1.15 U4.10 U5.10 U7.10 U9.10 | length 189.3
  Top Layer w0.35: U1.15 55.476,12.994 v1(56.485,11.985)
  Top Layer w0.5: v2(11.4,17.7) 13.896,17.7 15.257,19.061 U9.10 ; v2(13.178,44.116) 13.278,44.016 U5.10 ; v2(13.305,31.543) U7.10@16.141,31.543 ; U4.10 17.427,56.493 18,57.066 v2(18,59) ; v1(25.624,19.097) 25.624,15.905 28.655,12.874 v1(35.022,12.874)
  Bottom Layer w0.5: v2(11.4,17.7) 14.677,17.7 16.074,19.097 v1(25.624,19.097) 25.878,18.843 29.053,18.843 30.958,20.748 30.958,30.146 ; v2(13.178,44.116) 20.798,44.116 24.227,47.545 25.624,47.545 26.386,46.783 26.386,45.241 24.481,43.336 24.481,37.893 ; v2(13.305,31.543) 17.623,31.543 23.973,37.893 24.481,37.893 ; v2(18,59) 18.724,59 21.209,56.515 27.432,56.515 31.779,52.168 38.299,52.168 39.416,51.05 42.185,51.05 43.785,49.45 43.785,42.211 31.72,30.146 30.958,30.146 ; v1(35.022,12.874) 35.784,12.874 36.339,12.319 43.307,12.319 45.546,10.08 55.215,10.08 56.485,11.35 v1(56.485,11.985) ; 24.481,37.893 30.958,31.416 30.958,30.146
MULTIP_B: U1.14 U4.9 U5.9 U7.9 U9.9 | length 137.4
  Top Layer w0.35: v1(54.199,11.858) 54.976,12.635 U1.14
  Top Layer w0.5: v2@9.876,45.286 U5.9 ; v2@11.4,57.832 v2(11.469,57.763) U4.9 ; v2(12.924,18.97) 13.432,18.97 13.686,18.716 15.21,20.24 U9.9@15.972,20.24 ; U9.9@15.983,20.494 U9.9 ; U7.9 18.38,32.808 20.874,35.302 24.024,35.302 23.897,35.429 v1(23.897,35.963) ; v1(28.164,20.24) 33.164,15.24 37.084,15.24 v1(37.592,14.732)
  Bottom Layer w0.5: v2(11.469,57.763) 11.331,57.763 8.052,54.484 8.052,46.702 v2(9.876,44.878) 7.925,42.927 7.925,36.728 10.82,33.833 10.82,31.852 9.368,30.4 9.368,21.764 12.162,18.97 v2(12.924,18.97) 14.299,20.345 27.761,20.345 27.91,20.494 v1(28.164,20.24) 29.688,21.764 29.688,28.622 23.897,34.413 v1(23.897,35.963) ; v1(37.592,14.732) 39.243,13.081 43.815,13.081 45.673,11.223 53.564,11.223 v1(54.199,11.858)
MULTP_EN: U1.13 U4.6 U5.6 U7.6 U9.6 | length 105.6
  Top Layer w0.35: 53.264,12.747 U1.13
  Top Layer w0.5: U9.6 22.159,17.791 26.64,22.272 26.894,22.018 v1(26.894,21.764) 27.034,21.624 29.733,21.624 30.503,20.853 37.032,20.853 v1(37.816,21.637) ; U7.6 21.936,30.268 22.551,30.883 v1(25.243,30.883) 25.37,31.01 25.37,38.274 v1(26.005,38.909) ; U5.6 21.968,42.746 22.957,43.735 23.465,43.735 25.878,41.322 v1(27.275,41.322) ; U4.6 22.126,55.223 22.703,55.8 29.307,55.8 31.085,54.022 v1(31.085,41.83) ; v1(52.421,12.747) 53.264,12.747
  Bottom Layer w0.5: v1(25.243,30.883) 25.014,30.883 28.473,27.424 28.473,23.343 v1(26.894,21.764) ; v1@26.005,38.528 v1(26.005,38.909) 26.005,40.052 v1(27.275,41.322) 28.545,41.322 29.053,41.83 v1(31.085,41.83) ; v1(37.816,21.637) 42.769,21.637 46.706,17.7 46.706,13.89 47.849,12.747 v1(52.421,12.747)
NetC1_2: C1.2 U1.5 Z1.1 | length 18.5
  Top Layer w0.35: Z1.1@47.575,18.805 48.575,18.805 ; 48.575,18.784 53.676,18.784 U1.5@53.676,18.734
  Top Layer w0.5: C1.2 38.532,20.794 42.182,20.794 43.746,19.23 Z1.1 46.5,18.759 47.575,18.759 Z1.1@47.575,18.805
NetC2_2: C2.2 U1.3 Z2.1 | length 15
  Top Layer w0.35: 50.516,21.497 52.229,19.784 U1.3@53.565,19.784 ; U1.3@53.615,19.734 U1.3@53.712,19.734
  Top Layer w0.5: C2.2 46.732,26.023 48.644,26.023 Z2.1@48.644,26.811 ; Z2.1 48.666,25.9 50.516,24.05 50.516,21.497
NetC3_2: C3.2 U1.6 Z1.3 | length 16.7
  Top Layer w0.35: 48.988,18 49.272,18.284 53.176,18.284 U1.6
  Top Layer w0.5: C3.2 Z1.3 43.198,16.73 44.468,18 48.988,18
NetC4_2: C4.2 U1.4 Z2.2 | length 14.8
  Top Layer w0.35: Z2.2@48.666,22.344 51.726,19.284 U1.4@53.358,19.284
  Top Layer w0.5: C4.2@41.118,24.716 41.53,24.304 47.163,24.304 Z2.2 Z2.2@48.666,22.344
NetC12_1: C12.1 C13.1 L2.2 U6.15 | length 20
  Top Layer w0.35: L2.2 L2.2@51.328,48.484
  Top Layer w0.5: U6.15 C13.1@38.959,50.956 ; C13.1@38.959,50.999 48.205,50.999 L2.2 ; L2.2@51.328,48.484 C12.1@51.328,52.289
NetC17_1: C17.1 C18.1 L3.2 U10.15 | length 8
  Top Layer w0.5: U10.15 C18.1@39.322,35.97 ; C18.1 C17.1 L3.2
NetC21_2: C21.2 U11.3 U12.3 | length 31.9
  Top Layer w0.5: C21.2 64.922,35.386
  Top Layer w0.8: U12.3 65.465,53.146 71.882,59.563 U11.3
NetH1_1: H1.1 U1.26 | length 67.6
  Top Layer w0.35: U1.26 62.524,15.759 63.068,15.215
  Top Layer w0.5: 63.068,15.215 63.068,13.36 v1(64.745,11.684) ; v1(73.304,13.081) 74.041,13.818 81.763,13.818 83.007,15.062 83.007,50.495 84.023,51.511 87.122,51.511 87.686,52.075 H1.1
  Bottom Layer w0.5: v1(64.745,11.684) 71.907,11.684 v1(73.304,13.081)
NetH1_2: H1.2 R6.1 | length 2
  Top Layer w0.5: R6.1 H1.2
NetH2_1: H2.1 U1.25 | length 74.9
  Top Layer w0.35: v1@61.276,12.147 U1.25
  Top Layer w0.5: v1@61.276,12.147 v1(61.311,12.112) ; v1(71.196,15.113) 80.874,15.113 81.991,16.231 81.991,57.506 84.277,59.792 87.173,59.792 87.686,60.305 H2.1
  Bottom Layer w0.5: v1@61.717,12.112 v1(61.311,12.112) 62.28,13.081 67.259,13.081 69.291,15.113 v1(71.196,15.113)
NetH2_2: H2.2 R7.2 | length 2
  Top Layer w0.5: R7.2@85.687,58.427 H2.2
NetL1_1: L1.1 X3.1 | length 2.9
  Top Layer w0.5: L1.1@80.142,5.556 X3.1
NetL1_2: L1.2 U2.8 | length 9.2
  Top Layer w0.5: U2.8 76.105,11.332 76.903,12.13 79.57,12.13 80.078,11.622 L1.2
NetR3_1: R3.1 R4.2 U9.4 | length 30.8
  Top Layer w0.5: R3.1 R4.2 7.336,11.634 9.144,9.826 v2(17.242,9.826) ; U9.4 v1@23.628,15.251
  Bottom Layer w0.5: v2(17.242,9.826) 18.766,9.826 20.036,8.556 22.018,8.556 25.116,11.654 25.116,13.763 v1(23.846,15.033)
NetU2_4: U2.4 X3.3 | length 14.2
  Top Layer w0.35: U2.4 77.784,7.566 78.554,6.796 78.554,4.764 78.935,4.383
  Top Layer w0.5: 78.935,4.383 84.142,4.383 84.777,5.018 84.777,6.796 84.417,7.156 X3.3
NetU2_5: U2.5 X3.2 | length 6.7
  Top Layer w0.35: U2.5 78.173,8.066 79.316,6.923
  Top Layer w0.5: 79.316,6.923 80.713,6.923 81.28,6.356 X3.2
REF_4.5: U6.9 U8.6 U10.9 | length 31.2
  Top Layer w0.5: v1(30.831,39.29) 30.831,38.655 32.863,36.623 32.863,30.654 35.167,28.35 U10.9 ; v1(37.562,41.195) 37.562,42.205 U6.9 37.671,43.336 39.34,45.005 39.34,46.275 39.975,46.91 U8.6
  Bottom Layer w0.4: v1@31.085,39.29 31.847,40.052 36.673,40.052
  Bottom Layer w0.5: v1(30.831,39.29) v1@31.085,39.29 ; 36.673,40.052 37.562,40.941 v1(37.562,41.195)
RST: R2.2 S2.2 U1.7 | length 56
  Top Layer w0.35: 46.476,15.438 47.188,15.438 47.371,15.621 47.752,15.621 49.89,17.759 U1.7
  Top Layer w0.5: v2(45.182,14.144) 46.476,15.438 ; v1(49.53,7.137) 49.743,7.137 53.594,3.286 S2.2@53.594,2.594 ; S2.2@53,2 S2.2@53.068,1.932 ; S2.2 R2.2
  Bottom Layer w0.5: v2(45.182,14.144) 44.42,14.144 42.134,16.43 34.514,16.43 33.498,15.414 33.498,12.112 34.26,11.35 42.896,11.35 47.109,7.137 v1(49.53,7.137) ; v1(49.53,7.137) 49.923,7.137 49.53,7.53 v1(49.53,7.137)
SPI_ADC1_CS: U1.42 U6.4 | length 53.8
  Top Layer w0.35: v1(56.231,28.622) 57.476,27.377 U1.42
  Top Layer w0.5: v1(24.989,49.704) 24.989,49.196 25.769,48.416 U6.4 ; v1(39.34,42.592) 45.817,42.592 v1(46.452,41.957)
  Bottom Layer w0.5: v1(24.989,49.704) 31.982,49.704 39.094,42.592 v1(39.34,42.592) ; v1(46.452,41.957) 48.95,41.957 55.22,35.687 55.22,29.633 v1(56.231,28.622)
SPI_ADC2_CS: U1.43 U10.4 | length 45.1
  Top Layer w0.35: v1@56.104,26.209 56.976,25.337 U1.43
  Top Layer w0.5: U10.4 28.436,33.43 29.942,31.924 29.942,25.32 30.78,24.482 36.724,24.482 42.388,30.146 47.57,30.146 48.84,28.876 53.945,28.876 56.104,26.717 v1(56.104,26.59) v1@56.104,26.209
SPI_CLK: U1.39 U6.1 U10.1 | length 71.9
  Top Layer w0.35: U1.39 58.976,25.652 v1(60.041,26.717)
  Top Layer w0.5: U6.1 29.307,52.226 29.679,51.854 29.679,37.63 ; U10.1@27.449,37.122 29.171,37.122 29.679,37.63 ; v1(45.36,31.543) 42.287,31.543 36.11,25.366 31.598,25.366 30.755,26.209 30.755,35.81 29.679,36.886 29.679,37.63
  Bottom Layer w0.5: v1(45.36,31.543) 49.5,31.543 56.231,24.812 58.136,24.812 v1(60.041,26.717)
SPI_MISO: U1.40 U6.13 U10.13 | length 62.2
  Top Layer w0.35: 33.625,40.052 38.197,40.052 ; U1.40 58.476,27.057 v1(60.041,28.622)
  Top Layer w0.5: U10.13 34.895,33.43 33.625,34.7 33.625,40.052 33.625,47.418 34.623,48.416 U6.13 ; 38.197,40.052 39.42,41.275 44.848,41.275 46.071,40.052 46.071,34.845 50.131,30.785 58.801,30.785 60.041,29.545 v1(60.041,28.622)
SPI_MOSI: U1.41 U6.14 U10.14 | length 58.9
  Top Layer w0.35: U1.41 v1@57.976,29.097
  Top Layer w0.5: v1(32.487,38.735) 32.487,48.048 32.482,48.053 34.115,49.686 U6.14 ; v1(37.435,38.782) 35.022,38.782 34.387,38.147 34.387,35.226 34.913,34.7 U10.14 41.009,34.7 42.896,32.813 46.198,32.813 49.191,29.82 57.827,29.82 58.136,29.511 v1(58.136,29.257) v1@57.976,29.097
  Bottom Layer w0.5: v1(32.487,38.735) 33.4,38.735 33.353,38.782 v1(37.435,38.782)
SWC: U1.37 X4.2 | length 18
  Top Layer w0.35: U1.37 59.976,24.112
  Top Layer w0.5: 59.976,24.112 61.235,25.371 v1(64.287,25.371)
  Bottom Layer w0.3: v1@64.262,25.197 64.262,24.562 68.364,20.46 X4.2
SWD: U1.34 X4.1 | length 14.3
  Top Layer w0.35: U1.34 63.93,19.759 64.516,20.345
  Top Layer w0.5: 64.516,20.345 v1(64.516,21.285)
  Bottom Layer w0.3: v1(64.516,21.285) 65.481,21.285 68.846,17.92 X4.1
UART_RX: U1.31 U2.26 | length 26.2
  Top Layer w0.35: U1.31 63.046,18.259 64.768,16.537 ; 75.105,3.35 U2.26
  Top Layer w0.5: 64.768,16.537 67.95,13.355 67.95,13.093 69.672,11.371 69.672,5.055 72.034,2.692 74.447,2.692 75.105,3.35
UART_TX: U1.30 U2.25 | length 26.5
  Top Layer w0.35: U1.30 62.454,17.759 64.694,15.519 ; 74.117,3.708 74.605,4.196 U2.25
  Top Layer w0.5: v1(64.516,14.427) 64.694,14.605 64.694,15.519 ; v1(67.539,15.748) 70.815,12.471 70.815,5.283 72.39,3.708 74.117,3.708
  Bottom Layer w0.5: v1(64.516,14.427) 66.218,14.427 v1(67.539,15.748)
pads on no net: U1.2 U1.16 U1.17 U1.18 U1.19 U1.20 U1.21 U1.22 U1.27 U1.28 U1.29 U1.38 U1.45 U1.46 U2.1 U2.2 U2.7 U2.9 U2.10 U2.11 U2.12 U2.13 U2.14 U2.15 U2.16 U2.17 U2.18 U2.19 U2.20 U2.21 U2.22 U2.23 U2.24 U2.27 U2.28 U3.5 U3.8 U4.7 U5.7 U6.2 U6.3 U6.5 U6.12 U7.7 U8.1 U8.3 U8.5 U8.7 U8.8 U9.7 U10.2 U10.3 U10.5 U10.12 X3. X3.4 X7.3 X7.5 X7.7 X7.9 X7.10 X9.3 X9.5 X9.7 X9.9 X9.10 Z1.2 Z1.4 Z2.3 Z2.4
copper on no net: | length 577.8
  Top Layer w0.5: 90,1 89,1 88,0 2,0 0,2 0,61 2,63 88,63 90,61 90,14
  Bottom Layer w0.5: 90,1.013 89,1.013 88,0.013 2,0.013 0,2.013 0,61.013 2,63.013 88,63.013 90,61.013 90,14.013

## Polygon pours and split planes (outlines as drawn)
GNDA on Top Layer "Top Layer-No Net" (solid, remove dead copper, pour order 12): 0,0 0,63 25,63 34,54 53,54 53,45 32,24 32,12 32,0
GND on Top Layer "Top Layer-No Net" (solid, remove dead copper, pour order 10): 90,0 33,0 33,20 33,23 54,44 54,63 90,63
GNDA on Bottom Layer "Top Layer-No Net" (solid, remove dead copper, pour order 16): 0,0 0,63 53,63 53,45 32,24 32,0
GND on Bottom Layer "Top Layer-No Net" (solid, remove dead copper, pour order 14): 90,0 90,63 54,63 54,44 53.829,44 32.99,23.161 33,23.151 33,0

## Other copper
Top Layer:
  text "Polytech" at 41,61 h1
  text "BMS" at 33,59 h1
  text "Electrical" at 41,59 h1
  text "ver 1.1" at 33,57 h1
  text "Engineering" at 41,57 h1
  text "Department" at 41,55 h1
  text "2017" at 43,53 h1

## Silkscreen, mask and mechanical layers (free items; w line width, h text height)
Mechanical 15:
  lines w0.254: -7.3,31.5 82.7,31.5
  lines w0.5: -20,6 100,6 ; -9.897,56.754 111.103,56.754 ; 20,-11.5 20,74 ; 45,-22 45,75 ; 70,-11.5 70,74

## Dimensions
0,2.013 to 90,1.013 on Top Overlay
88,0.013 to 86.764,62.965 on Top Overlay
24,60 to 66,60 on Top Overlay
24,3 to 66,3 on Top Overlay
66,60 to 66,3 on Top Overlay